# EAGLE board eagleassign (EAGLE 7.7.0)
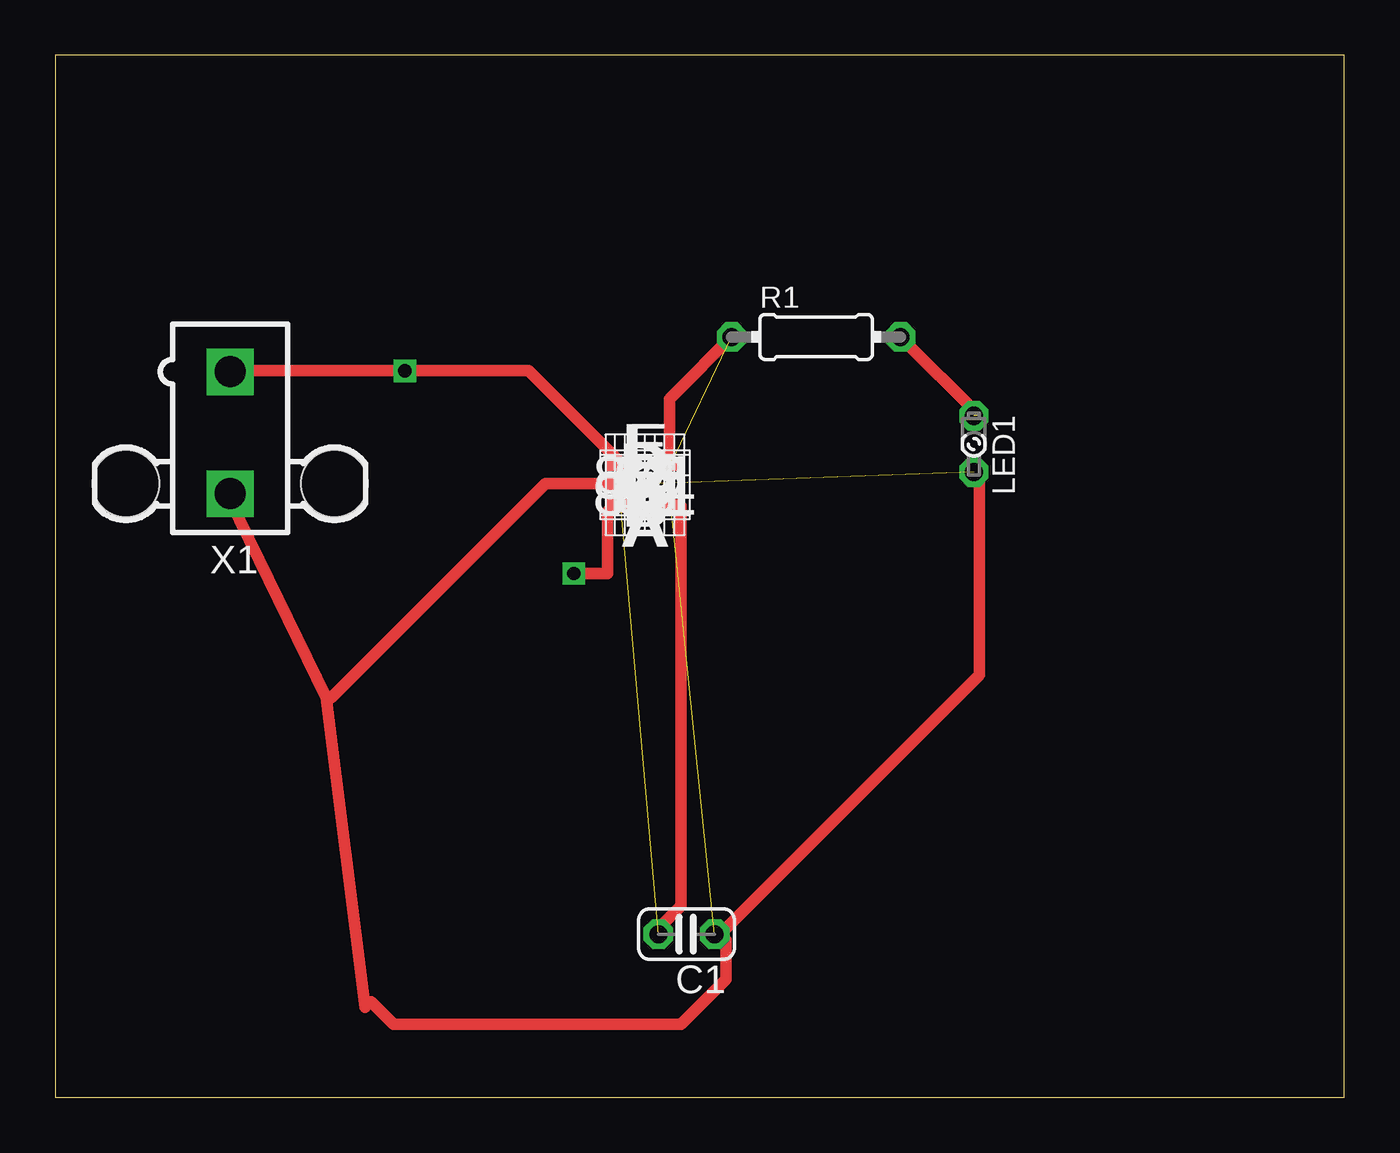
[diagram p0: board, top side]
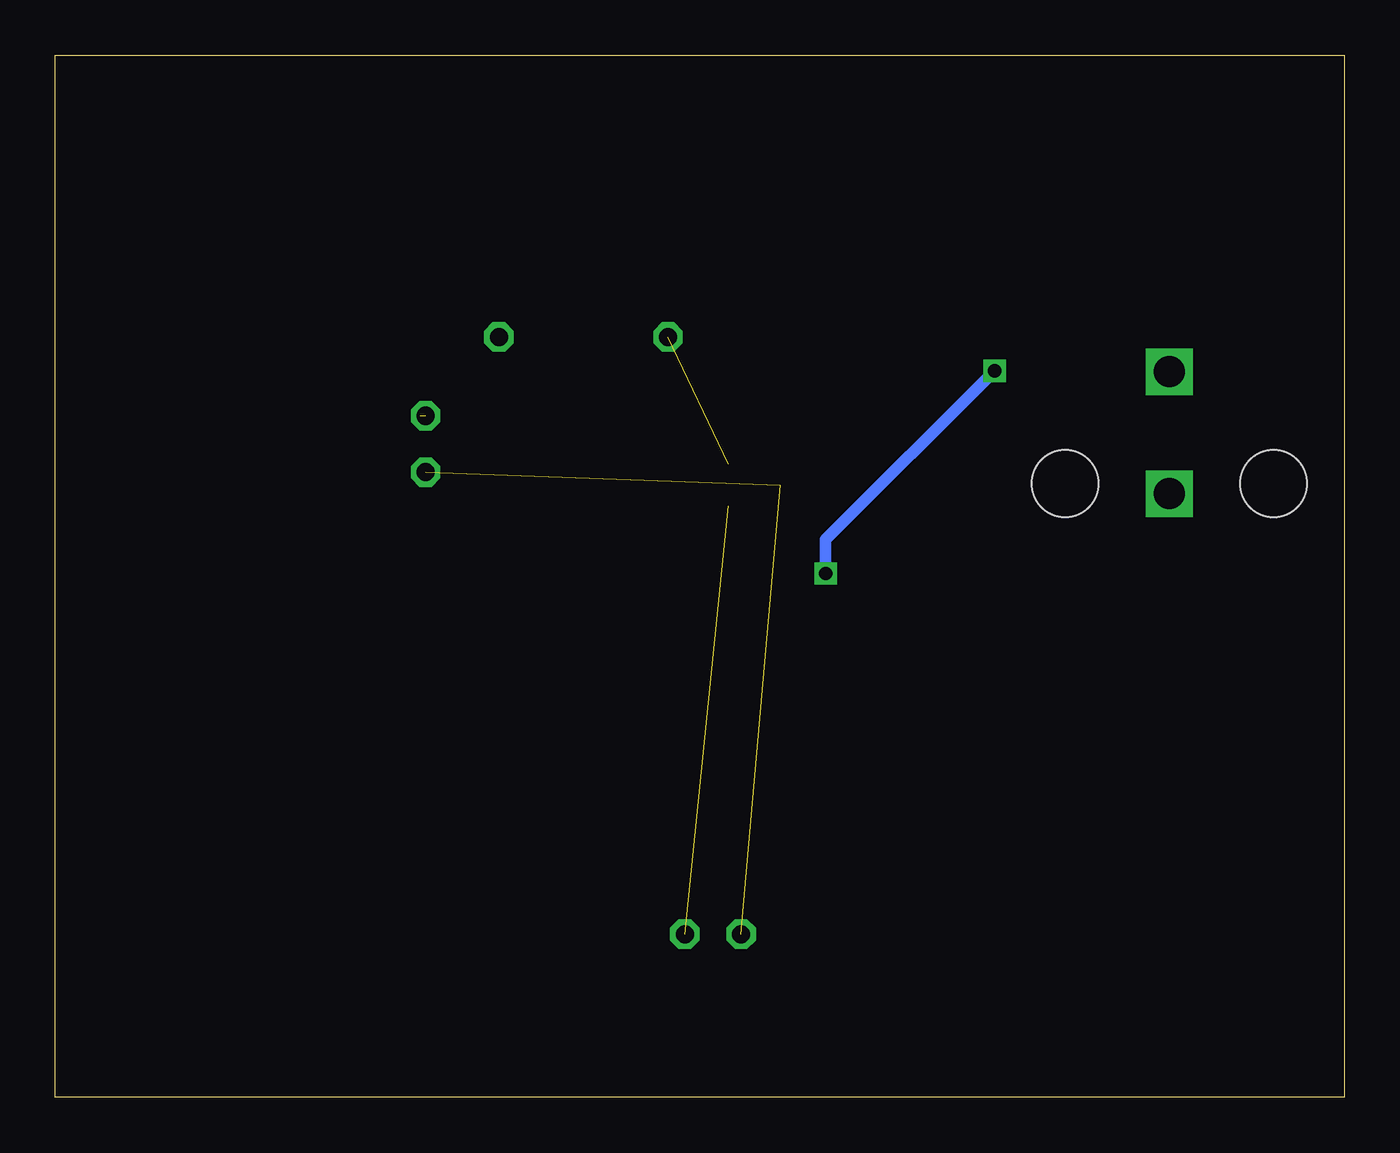
[diagram p1: board, bottom side, seen from below]

Size 58.09 x 46.98 mm. Coordinates in mm from the lower left corner, seen from the top.
Outline: 0,0 58.09,0 58.09,46.98 0,46.98 0,0
Copper layers (1*16): Top 0.035mm / dielectric 1.5mm / Bottom 0.035mm
Design rules "default": minimum track width 10mil, minimum drill 24mil, track to track 8mil, track to pad 8mil, pad to pad 8mil, via to via 8mil, smd to smd 8mil, copper to edge 40mil, drill to drill 8mil, minimum pad ring 10mil, minimum via ring 8mil, stop-mask expansion 4mil, vias tented up to drill 0mil, thermal gap 10mil

## Footprints (pad centres in the part's own frame; a part is rotated, then mirrored left to right if it is on the bottom)
C025-024X044 = drill 0.813 octagon: 1 -1.27,0; 2 1.27,0
LSU260 = drill 0.813 octagon: A -1.27,0; K 1.27,0
0204/7 = drill 0.813 octagon: 1 -3.81,0; 2 3.81,0
TPS799 = smd 1.1 x 0.6: EN 0,0; GND 0,0.95; IN 0,1.9; NR 2.35,0; OUT 2.35,1.9
5566-2 = drill 1.4 square: 1 0,-2.75; 2 0,2.75 | hole 3: 4.7,2.29; -4.7,2.29

## Placement (x,y rotation side)
C1  [C025-024X044]  28.45,7.37 180 top
LED1  [LSU260]  41.4,29.46 270 top
R1  [0204/7]  34.29,34.29 0 top
U$1  TPS799  [TPS799]  25.4,26.67 0 top
X1  5566-2  [5566-2]  7.87,29.97 180 top

## Library data of the parts
C1 R1 = rcl
LED1 = led
U$1 = tps799_1
X1 = con-molex; OC_FARNELL: 1822072; OC_NEWARK: unknown

## Nets
GND: C1.2 LED1.K U$1.GND X1.2
N$1: C1.1 U$1.NR
N$3: R1.1 U$1.OUT
N$4: LED1.A R1.2
N$5: X1.1

## Tracks (layer width: path | path; a pad name or v marks a point on that pad's centre or on a via)
GND  (2 unrouted)
  pour Top (isolate 1.524): 0,0 58.17,0 58.17,46.74 0,46.74
N$1  (1 unrouted)
N$2
  Top 0.508: 41.66,28.19 41.66,19.05 29.72,7.11
N$3  (1 unrouted)
N$4  (1 unrouted)
  Top 0.508: R1.2 41.66,30.73
N$6
  Top 0.508: 27.69,28.7 27.69,31.5 30.73,34.54
N$7
  Top 0.508: 28.19,26.67 28.19,8.64 26.92,7.37
N$8
  Top 0.508: 30.23,7.11 30.23,5.33 28.19,3.3 15.24,3.3 14.99,3.56 14.48,4.06 14.22,4.32 13.97,4.32
N$9
  Top 0.508: 13.97,4.06 12.19,18.03 | 12.19,18.03 7.87,26.92 | 12.19,18.03 12.45,18.03 22.1,27.69 25.4,27.69
N$11  (via drill 0.6)
  Top 0.508: 8.13,32.77 v15.75,32.77 21.34,32.77 25.4,28.7 | v23.37,23.62 24.89,23.62 24.89,26.42 25.15,26.67
  Bottom 0.508: v23.37,23.62 23.37,25.15 v15.75,32.77